# Altium PCB Pedal_Filters_45.PcbDoc (part 4 of 4)
Units mil, origin at the board's own origin, x right, y up, seen from the top; angles counter-clockwise.
Board outline 4875 x 3407.56 mil, 4 copper layers (Top Layer, Layer 1, Layer 2, Bottom Layer); 245 components, 181 nets, 874 pads, 470 vias.
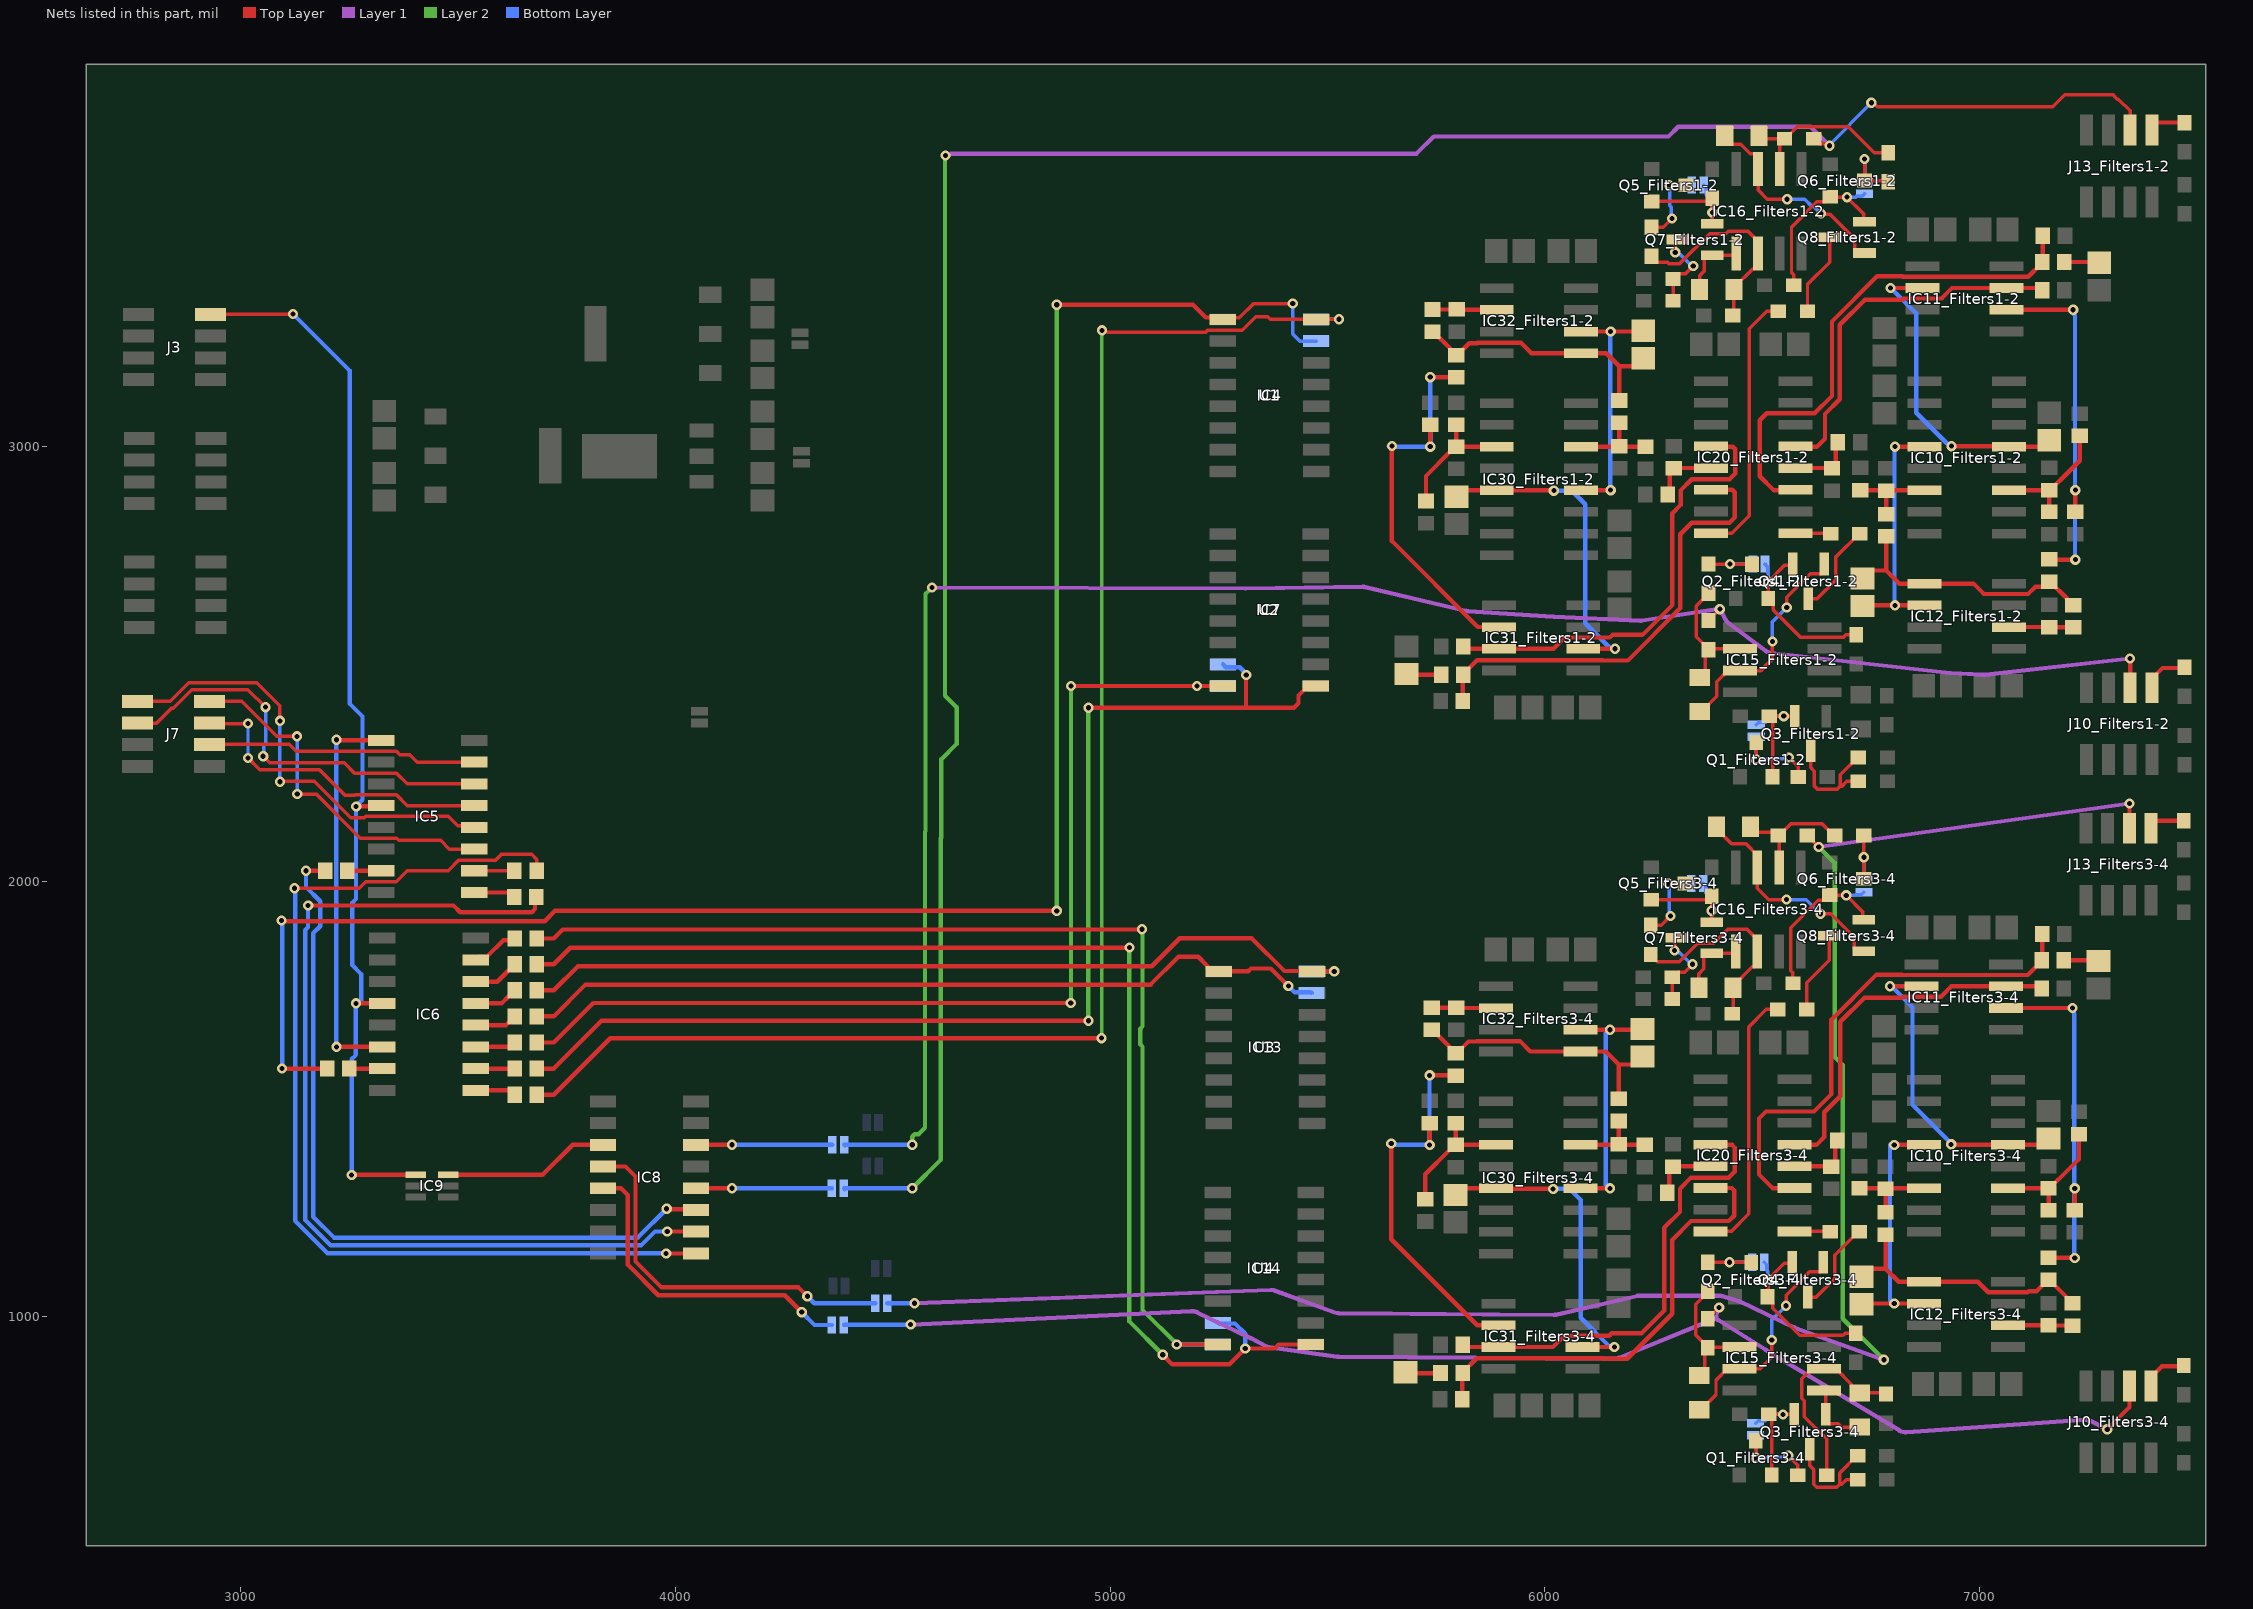
[diagram p5: the nets of this part, all layers, seen from the top]

## Via types
v1: diameter 23.62, hole 11.81, Top Layer to Bottom Layer, 470 vias

## Nets (pads, with @x,y where several pads share a name; then routed paths per layer and width w, separated by ;. In a path a pad name is that pad's centre, name@x,y a point inside that pad or via, vN(x,y) a via of type N, cw(c..) or ccw(c..) an arc to the next point about the centre after c; other vN are vias at no path point) (continued)
NetC1_Filters3-4_1: C1_Filters3-4.1 IC15_Filters3-4.1 Q3_Filters3-4.1 | length 156.6
  Top Layer w8: IC15_Filters3-4.1@6642,829.41 6646,825.41 6646,768.1 6651,763.1 6651,754.41 6653,752.41 6675.5,752.41 6682.87,745.04 C1_Filters3-4.1@6725,745.04
NetC1_Filters3-4_2: C1_Filters3-4.2 IC15_Filters3-4.2 R42_Filters3-4.1 R47_Filters3-4.2 | length 476.1
  Top Layer w8: R42_Filters3-4.1@6648.46,634.41 6648.46,717.97 6597,769.44 6597,805.38 6591,811.38 6591,856.41 6614,879.41 6670,879.41 6705.38,844.03 6705.38,839.46 6721.06,823.78 6782.56,823.78 R47_Filters3-4.2@6785,821.34
NetC2_Filters1-2_1: C2_Filters1-2.1 IC15_Filters1-2.7 Q4_Filters1-2.1 | length 515.2
  Top Layer w8: C2_Filters1-2.1@6360.43,2391.39 6395.31,2426.26 6395.31,2459.57 6421.5,2485.76 6497.3,2485.76 6523.75,2512.21 v1(6523.75,2552.72) ; v1(6556.5,2630.76) 6556.5,2654.73 6610.53,2708.76 6635.5,2708.76 6642.5,2715.76 Q4_Filters1-2.1@6642.5,2730.76
  Bottom Layer w8: v1(6523.75,2552.72) 6523.75,2598.01 v1(6556.5,2630.76)
NetC2_Filters1-2_2: C2_Filters1-2.2 IC15_Filters1-2.6 R44_Filters1-2.1 R48_Filters1-2.2 | length 294
  Top Layer w8: C2_Filters1-2.2@6366.5,2470.76 6369.16,2473.42 6369.16,2526.49 R48_Filters1-2.2@6376.5,2533.83 ; R44_Filters1-2.1@6376.5,2663.83 6376.5,2661.86 6348.75,2634.11 6348.75,2563.54 6376.5,2535.8 R48_Filters1-2.2@6376.5,2533.83 ; IC15_Filters1-2.6@6449.5,2535.76 6378.42,2535.76 R48_Filters1-2.2@6376.5,2533.83
NetC2_Filters3-4_1: C2_Filters3-4.1 IC15_Filters3-4.7 Q4_Filters3-4.1 | length 519.2
  Top Layer w8: C2_Filters3-4.1@6355,785.04 6358.94,785.04 6393.81,819.91 6393.81,853.22 6420,879.41 6495.8,879.41 6522.12,905.72 v1(6522.12,945.76) ; v1(6555,1024.41) 6555,1048.38 6609.03,1102.41 6634,1102.41 6641,1109.41 Q4_Filters3-4.1@6641,1124.41
  Bottom Layer w8: v1(6522.12,945.76) 6522.26,945.9 6522.26,991.67 v1(6555,1024.41)
NetC2_Filters3-4_2: C2_Filters3-4.2 IC15_Filters3-4.6 R44_Filters3-4.1 R48_Filters3-4.2 | length 294
  Top Layer w8: C2_Filters3-4.2@6365,864.41 6367.66,867.07 6367.66,920.14 R48_Filters3-4.2@6375,927.48 ; R44_Filters3-4.1@6375,1057.48 6375,1055.51 6347.25,1027.76 6347.25,957.2 6375,929.45 R48_Filters3-4.2@6375,927.48 ; IC15_Filters3-4.6@6448,929.41 6376.93,929.41 R48_Filters3-4.2@6375,927.48
NetC5_Filters1-2_1: C5_Filters1-2.1 IC12_Filters1-2.1 R2_Filters1-2.1 R8_Filters1-2.2 R11_Filters1-2.2 | length 629.5
  Top Layer w10: C5_Filters1-2.1@6730.5,2697.25 6749,2715.76 6785.5,2715.76 ; R8_Filters1-2.2@6785.5,2794.58 6785.5,2715.76 ; R2_Filters1-2.1@7215.5,2636.35 7213.53,2636.35 7201.8,2648.08 7201.8,2650.84 7162.46,2690.17 7158.53,2690.17 7146.8,2678.43 7128.56,2678.43 7111.88,2661.76 7010.18,2661.76 6986.18,2685.76 IC12_Filters1-2.1@6873.5,2685.76 6815.5,2685.76 6785.5,2715.76
NetC5_Filters1-2_2: C5_Filters1-2.2 IC10_Filters1-2.12 IC12_Filters1-2.2 | length 576.6
  Top Layer w10: C5_Filters1-2.2@6730.5,2634.26 6731.99,2635.76 IC12_Filters1-2.2@6873.5,2635.76 ; v1(6805.5,3000.76) IC10_Filters1-2.12@6873.5,3000.76
  Bottom Layer w10: v1@6804.39,2635.76 v1@6804.39,3000.76
  other v1: 6805.5,2635.76
NetC5_Filters3-4_1: C5_Filters3-4.1 IC12_Filters3-4.1 R2_Filters3-4.1 R8_Filters3-4.2 R11_Filters3-4.2 | length 629.5
  Top Layer w10: C5_Filters3-4.1@6729,1090.91 6747.5,1109.41 6784,1109.41 ; R8_Filters3-4.2@6784,1188.23 6784,1109.41 ; R2_Filters3-4.1@7214,1030 7212.03,1030 7200.3,1041.73 7200.3,1044.49 7160.97,1083.82 7157.03,1083.82 7131.16,1057.94 7113.03,1057.94 7110.49,1055.41 7020.25,1055.41 6996.25,1079.41 IC12_Filters3-4.1@6872,1079.41 6814,1079.41 6784,1109.41
NetC5_Filters3-4_2: C5_Filters3-4.2 IC10_Filters3-4.12 IC12_Filters3-4.2 | length 576.6
  Top Layer w10: C5_Filters3-4.2@6729,1027.91 6730.5,1029.41 IC12_Filters3-4.2@6872,1029.41 ; v1(6804,1394.41) IC10_Filters3-4.12@6872,1394.41
  Bottom Layer w10: v1@6794,1029.41 v1@6794,1394.41
  other v1: 6804,1029.41
NetC6_Filters1-2_2: C6_Filters1-2.2 IC10_Filters1-2.5 IC11_Filters1-2.6 | length 728.8
  Top Layer w10: v1(6795.5,3365.76) IC11_Filters1-2.6@6868.5,3365.76 ; v1(6935.69,3001.98) 6936.3,3001.37 7066.88,3001.37 IC10_Filters1-2.5@7067.5,3000.76 7145.5,3000.76 C6_Filters1-2.2@7160.5,3015.76
  Bottom Layer w10: v1@6795.93,3365.76 6854.27,3307.41 6854.27,3078.91 6924.77,3008.41 6926.15,3008.41 6932.58,3001.98 v1(6935.69,3001.98)
NetC6_Filters3-4_2: C6_Filters3-4.2 IC10_Filters3-4.5 IC11_Filters3-4.6 | length 723.8
  Top Layer w10: v1(6794,1759.41) IC11_Filters3-4.6@6867,1759.41 ; v1(6934.77,1395.64) 6935.38,1395.02 7065.39,1395.02 IC10_Filters3-4.5@7066,1394.41 7144,1394.41 C6_Filters3-4.2@7159,1409.41
  Bottom Layer w10: v1(6794,1759.41) 6797.69,1759.41 6804.5,1752.6 6845.91,1711.19 6845.91,1486.7 v1@6933.21,1399.4
NetC9_Filters1-2_1: C9_Filters1-2.1 R13_Filters1-2.2 | length 80.8
  Top Layer w10: R13_Filters1-2.2@7195.5,3425.76 7273.49,3425.76 C9_Filters1-2.1@7275.5,3423.75
NetC9_Filters3-4_1: C9_Filters3-4.1 R13_Filters3-4.2 | length 80.8
  Top Layer w10: R13_Filters3-4.2@7194,1819.41 7271.99,1819.41 C9_Filters3-4.1@7274,1817.4
NetC10_Filters1-2_1: C10_Filters1-2.1 R18_Filters1-2.2 | length 80.8
  Top Layer w10: C10_Filters1-2.1@5681.5,2477.76 5683.5,2475.76 R18_Filters1-2.2@5761.5,2475.76
NetC10_Filters3-4_1: C10_Filters3-4.1 R18_Filters3-4.2 | length 80.8
  Top Layer w10: C10_Filters3-4.1@5680,871.42 5682.01,869.41 R18_Filters3-4.2@5760,869.41
NetC11_Filters1-2_2: C11_Filters1-2.2 IC30_Filters1-2.5 IC31_Filters1-2.6 | length 745.9
  Top Layer w10: C11_Filters1-2.2@5796.5,2885.76 5811.5,2900.76 IC30_Filters1-2.5@5889.5,2900.76 5890.11,2900.14 6020.12,2900.14 v1(6020.73,2899.53) ; IC31_Filters1-2.6@6088.5,2535.76 v1(6161.5,2535.76)
  Bottom Layer w10: v1(6020.73,2899.53) 6061.74,2899.53 6092.77,2868.5 6092.77,2594.48 v1@6151.5,2535.76
NetC11_Filters3-4_2: C11_Filters3-4.2 IC30_Filters3-4.5 IC31_Filters3-4.6 | length 744.1
  Top Layer w10: C11_Filters3-4.2@5795,1279.41 5810,1294.41 IC30_Filters3-4.5@5888,1294.41 5888.61,1293.8 6018.62,1293.8 v1(6019.23,1293.18) ; IC31_Filters3-4.6@6087,929.41 v1(6160,929.41)
  Bottom Layer w10: v1(6019.23,1293.18) 6057.17,1293.18 6082.75,1267.6 6082.75,996.66 v1@6150,929.41
NetC12_Filters1-2_1: C12_Filters1-2.1 IC32_Filters1-2.1 R20_Filters1-2.2 R25_Filters1-2.2 R31_Filters1-2.1 | length 629.4
  Top Layer w10: R31_Filters1-2.1@5741.5,3265.17 5743.46,3265.17 5782.8,3225.84 5782.8,3223.08 5794.53,3211.35 5798.46,3211.35 5825.92,3238.8 5844.35,3238.8 5845.16,3239.61 5945.19,3239.61 5969.05,3215.76 6083.5,3215.76 6141.5,3215.76 6171.5,3185.76 ; R25_Filters1-2.2@6171.5,3106.94 6171.5,3185.76 ; C12_Filters1-2.1@6226.5,3204.26 6207.99,3185.76 6171.5,3185.76
NetC12_Filters1-2_2: C12_Filters1-2.2 IC30_Filters1-2.12 IC32_Filters1-2.2 | length 576.7
  Top Layer w10: IC30_Filters1-2.12@6083.5,2900.76 v1(6151.5,2900.76) ; IC32_Filters1-2.2@6083.5,3265.76 6083.57,3265.69 6151.42,3265.69 v1(6151.5,3265.76) 6225,3265.76 C12_Filters1-2.2@6226.5,3267.25
  Bottom Layer w10: v1@6150.29,2901.68 v1@6150.29,3266.68
NetC12_Filters3-4_1: C12_Filters3-4.1 IC32_Filters3-4.1 R20_Filters3-4.2 R25_Filters3-4.2 R31_Filters3-4.1 | length 629.4
  Top Layer w10: R31_Filters3-4.1@5740,1658.82 5741.97,1658.82 5781.3,1619.49 5781.3,1616.73 5793.03,1605 5796.97,1605 5824.42,1632.46 5842.85,1632.46 5843.66,1633.27 5942.74,1633.27 5966.6,1609.41 6082,1609.41 6140,1609.41 6170,1579.41 ; R25_Filters3-4.2@6170,1500.59 6170,1579.41 ; C12_Filters3-4.1@6225,1597.91 6206.5,1579.41 6170,1579.41
NetC12_Filters3-4_2: C12_Filters3-4.2 IC30_Filters3-4.12 IC32_Filters3-4.2 | length 576.6
  Top Layer w10: IC30_Filters3-4.12@6082,1294.41 v1(6150,1294.41) ; IC32_Filters3-4.2@6082.07,1659.34 6149.93,1659.34 v1(6150,1659.41) 6223.5,1659.41 C12_Filters3-4.2@6225,1660.91
  Bottom Layer w10: v1@6140,1294.41 v1@6140,1659.41
NetC27_Filters1-2_1: C27_Filters1-2.1 IC16_Filters1-2.1 Q7_Filters1-2.1 | length 154.4
  Top Layer w8: C27_Filters1-2.1@6356.13,3362.35 6356.13,3394.48 6367.31,3405.66 6367.31,3434.35 6374.31,3441.35 6436.5,3441.35 IC16_Filters1-2.1@6440.5,3445.35
NetC27_Filters1-2_2: C27_Filters1-2.2 IC16_Filters1-2.2 R52_Filters1-2.1 R58_Filters1-2.2 | length 489.2
  Top Layer w8: R52_Filters1-2.1@6245.5,3436.91 6257.24,3425.17 6282.4,3425.17 6285.53,3422.04 6310.69,3422.04 6378.99,3490.35 6416.47,3490.35 6422.47,3496.35 6467.5,3496.35 6490.5,3473.35 6490.5,3417.35 6483.5,3410.35 6478.93,3410.35 6434.87,3366.28 6434.87,3304.79 R58_Filters1-2.2@6432.43,3302.35
NetC27_Filters3-4_1: C27_Filters3-4.1 IC16_Filters3-4.1 Q7_Filters3-4.1 | length 154.4
  Top Layer w8: C27_Filters3-4.1@6354.63,1756 6354.63,1788.13 6365.81,1799.31 6365.81,1828 6372.81,1835 6435,1835 IC16_Filters3-4.1@6439,1839
NetC27_Filters3-4_2: C27_Filters3-4.2 IC16_Filters3-4.2 R52_Filters3-4.1 R58_Filters3-4.2 | length 491.2
  Top Layer w8: R52_Filters3-4.1@6244,1832.54 6244,1830.57 6258.88,1815.69 6309.19,1815.69 6351.5,1858 6388.97,1858 6420.97,1890 6466,1890 6489,1867 6489,1811 6482,1804 6477.43,1804 6433.37,1759.94 6433.37,1698.44 R58_Filters3-4.2@6430.93,1696
NetC28_Filters1-2_1: C28_Filters1-2.1 IC16_Filters1-2.7 Q8_Filters1-2.1 | length 490.6
  Top Layer w8: C28_Filters1-2.1@6413.96,3712.1 6429.65,3696.42 6450.4,3696.42 6472.47,3674.35 6483.5,3674.35 6490.5,3667.35 IC16_Filters1-2.7@6490.5,3639.35 6490.5,3591.55 6512.05,3570 v1(6557.46,3570) ; v1(6635.5,3537) 6636.78,3535.71 6656.11,3535.71 6713.5,3478.32 6713.5,3453.35 6720.5,3446.35 Q8_Filters1-2.1@6735.5,3446.35
  Bottom Layer w8: v1(6557.46,3570) 6597.85,3570 6613.51,3554.34 6618.15,3554.34 v1(6635.5,3537)
NetC28_Filters1-2_2: C28_Filters1-2.2 IC16_Filters1-2.6 R54_Filters1-2.1 R59_Filters1-2.2 | length 413.9
  Top Layer w8: C28_Filters1-2.2@6495.8,3708.92 R59_Filters1-2.2@6551.34,3708.92 6540.5,3698.08 IC16_Filters1-2.6@6540.5,3639.35 ; R59_Filters1-2.2@6540.54,3712.35 6556.73,3712.35 6581.05,3736.67 6697.99,3736.67 6757.73,3676.93 R54_Filters1-2.1@6790,3676.93
NetC28_Filters3-4_1: C28_Filters3-4.1 IC16_Filters3-4.7 Q8_Filters3-4.1 | length 519.2
  Top Layer w8: C28_Filters3-4.1@6394.63,2126 6394.63,2122.06 6429.5,2087.19 6462.81,2087.19 6489,2061 6489,1985.2 6515.46,1958.74 v1(6555.97,1958.74) ; v1(6634.31,1925.99) 6657.98,1925.99 6712,1871.97 6712,1847 6719,1840 Q8_Filters3-4.1@6734,1840
  Bottom Layer w8: v1(6555.97,1958.74) 6601.26,1958.74 6634.01,1925.99 v1(6634.31,1925.99)
NetC28_Filters3-4_2: C28_Filters3-4.2 IC16_Filters3-4.6 R54_Filters3-4.1 R59_Filters3-4.2 | length 294
  Top Layer w8: C28_Filters3-4.2@6474,2116 6476.66,2113.34 6531.7,2113.34 6539.04,2106 6566.79,2133.75 6637.35,2133.75 6665.1,2106 R54_Filters3-4.1@6667.07,2106 ; R59_Filters3-4.2@6537.07,2106 6539,2104.07 IC16_Filters3-4.6@6539,2033
NetIC4_1: IC4.1 R21.1 U1.10 | length 4335.9
  Top Layer w8: IC4.1@5259.57,3293.74 5263.23,3297.4 5297.4,3297.4 5330,3330 v1(5420,3330)
  Top Layer w10: v1(3093.53,1910.92) 3095.36,1909.1 3699.1,1909.1 3722.84,1932.84 v1(4877.16,1932.84) ; v1(3095,1570) R21.1@3198.82,1570 ; v1(4877.16,3327.16) 5190.8,3327.16 5219.92,3298.03 5255.27,3298.03 IC4.1@5259.57,3293.74
  Layer 2 w10: v1(4877.16,1932.84) v1(4877.16,3327.16)
  Bottom Layer w8: v1(5420,3330) 5420,3260 5436.26,3243.74 U1.10@5473.63,3243.74
  Bottom Layer w10: v1(3093.53,1910.92) 3095,1909.46 v1(3095,1570)
NetIC4_16: IC4.16 R22.1 U1.9 | length 3597.5
  Top Layer w8: v1(4981.16,3268.27) 4984.15,3265.28 4992.79,3265.28 4993.66,3264.41 5219.96,3264.41 5224.09,3268.53 5304.12,3268.53 5334.86,3299.27 5362.46,3299.27 5368,3293.74 v1(5526.26,3293.74)
  Top Layer w10: R22.1@3681.18,1510 3720,1510 3850,1640 v1(4980,1640)
  Layer 2 w8: v1(4980,1640) 4981.16,1641.16 v1(4981.16,3268.27)
  Bottom Layer w8: U1.9@5473.63,3293.74 v1(5526.26,3293.74)
NetIC5_1: IC5.1 R34.1 | length 95.7
  Top Layer w10: IC5.1@3537.28,1975 3618.82,1975 R34.1@3628.82,1965
NetIC5_2: IC5.2 R35.1 | length 92.1
  Top Layer w8: IC5.2@3537.28,2025 R35.1@3629.41,2025
NetIC5_9: IC5.9 IC6.14 | length 915.2
  Top Layer w10: v1(3220,1620) IC6.14@3325.43,1620 ; v1(3220,2326.46) 3220.76,2325.7 3322.02,2325.7 IC5.9@3322.72,2325
  Bottom Layer w10: v1(3220,1620) v1(3220,2326.46)
NetIC5_15: IC5.15 R33.1 | length 77.7
  Top Layer w10: R33.1@3245,2025 IC5.15@3322.72,2025
NetIC6_1: IC6.1 R22.2 | length 94.1
  Top Layer w10: IC6.1@3540,1520 3620,1520 R22.2@3630,1510
NetIC6_2: IC6.2 R36.2 | length 90
  Top Layer w10: IC6.2@3540,1570 R36.2@3630,1570
NetIC6_3: IC6.3 R37.2 | length 94.1
  Top Layer w10: IC6.3@3540,1620 3620,1620 R37.2@3630,1630
NetIC6_4: IC6.4 R38.2 | length 99.4
  Top Layer w10: IC6.4@3540,1670 3610,1670 3616.3,1676.3 3618.27,1676.3 3630,1688.03 R38.2@3630,1690
NetIC6_5: IC6.5 R39.2 | length 103.6
  Top Layer w10: IC6.5@3540,1720 3600,1720 3616.3,1736.3 3618.27,1736.3 3630,1748.03 R39.2@3630,1750
NetIC6_6: IC6.6 R40.2 | length 107.7
  Top Layer w10: IC6.6@3540,1770 3590,1770 3616.3,1796.3 3618.27,1796.3 3630,1808.03 R40.2@3630,1810
NetIC6_7: IC6.7 R41.2 | length 110.5
  Top Layer w10: IC6.7@3540,1820 3547.8,1827.8 3566.61,1827.8 3604.13,1865.31 3625.9,1865.31 R41.2@3630,1869.41
NetIC6_15: IC6.15 R21.2 | length 75.4
  Top Layer w10: R21.2@3250,1570 IC6.15@3325.43,1570
NetIC7_1: IC7.1 R36.1 U2.10 | length 2729.1
  Top Layer w10: R36.1@3681.18,1570 3720,1570 3830,1680 v1(4950,1680) ; v1(4950,2400) 5312.73,2400 ; v1@5312.73,2475.07 5312.73,2400 ; IC7.1@5473.15,2450.08 5455.43,2450.08 5433.49,2428.14 5433.49,2410.43 5423.07,2400 5312.73,2400
  Layer 2 w10: v1(4950,1680) v1(4950,2400)
  Bottom Layer w10: U2.10@5259.6,2500.08 5266.18,2493.5 5298.05,2493.5 5313.26,2478.29 v1(5313.26,2475.61)
NetIC7_16: IC7.16 R37.1 U2.9 | length 2403.4
  Top Layer w10: R37.1@3681.18,1630 3720,1630 3810.71,1720.71 v1(4909.29,1720.71) ; v1(4910.08,2450.08) IC7.16@5258.58,2450.08
  Layer 2 w10: v1(4909.29,1720.71) 4910.08,1721.5 v1(4910.08,2450.08)
  Bottom Layer w10: v1(5200.08,2450.08) U2.9@5259.6,2450.08
NetIC8_3: IC8.3 IC9.6 | length 385.6
  Top Layer w10: IC9.6@3477.4,1325.59 3694.41,1325.59 3763.52,1394.71 IC8.3@3833.58,1394.71 IC8.3@3832.99,1395.3
NetIC8_9: IC8.9 R35.2 | length 2339.4
  Top Layer w8: v1(3123.37,1984.81) 3123.56,1985 3272.44,1985 3287.23,1999.8 3357.79,1999.8 3382.99,2025 3477.01,2025 3501.8,2049.8 3586.53,2049.8 3599.68,2062.95 3669.04,2062.95 3680.98,2051.01 3680.98,2025.39 R35.2@3680.59,2025
  Top Layer w10: v1(3978.58,1144.71) IC8.9@4047.13,1144.71
  Bottom Layer w10: v1(3123.37,1984.81) 3125,1983.18 3125,1219.72 3199.53,1145.19 v1@3978.1,1145.19
NetIC8_10: IC8.10 R34.2 | length 2221.8
  Top Layer w10: v1(3155,1945) 3489.49,1945 3504.96,1929.53 3669.36,1929.53 3676.99,1937.16 3676.99,1961.99 R34.2@3679.31,1964.31 ; v1(3981.07,1195.32) 4046.51,1195.32 IC8.10@4047.13,1194.71
  Bottom Layer w10: v1@3154.72,1944.72 3154.72,1894.91 3148.38,1888.56 3148.38,1221.79 3206.98,1163.19 3920.73,1163.19 3952.86,1195.32 v1(3981.07,1195.32)
NetIC8_11: IC8.11 R33.2 | length 1789.3
  Top Layer w10: v1(3150,2025) R33.2@3193.82,2025 ; v1(3979.7,1247.62) 3981.16,1246.16 4045.67,1246.16 IC8.11@4047.13,1244.71
  Bottom Layer w10: v1(3150,2025) 3150,1987.92 3182.73,1955.19 3182.73,1897.46 3166.38,1881.11 3166.38,1229.25 3214.44,1181.19 3913.28,1181.19 v1(3979.7,1247.62)
NetIC10_Filters1-2_3: IC10_Filters1-2.3 R3_Filters1-2.2 R7_Filters1-2.2 R9_Filters1-2.1 | length 298.5
  Top Layer w10: IC10_Filters1-2.3@7067.5,2900.76 R3_Filters1-2.2@7160.5,2900.76 ; R7_Filters1-2.2@7160.5,2850.76 R3_Filters1-2.2@7160.5,2900.76 ; R9_Filters1-2.1@7230.5,3025.76 7230.5,2968.12 7184.58,2922.21 7183.91,2922.21 7162.46,2900.76 R3_Filters1-2.2@7160.5,2900.76
NetIC10_Filters1-2_14: IC10_Filters1-2.14 R1_Filters1-2.2 R4_Filters1-2.2 R8_Filters1-2.1 | length 202.8
  Top Layer w10: R4_Filters1-2.2@6725.5,2900.76 6784.31,2900.76 R1_Filters1-2.2@6785.5,2899.58 ; R8_Filters1-2.1@6785.5,2845.76 R1_Filters1-2.2@6785.5,2899.58 ; IC10_Filters1-2.14@6873.5,2900.76 6786.68,2900.76 R1_Filters1-2.2@6785.5,2899.58
NetIC10_Filters3-4_3: IC10_Filters3-4.3 R3_Filters3-4.2 R7_Filters3-4.2 R9_Filters3-4.1 | length 298.5
  Top Layer w10: IC10_Filters3-4.3@7066,1294.41 R3_Filters3-4.2@7159,1294.41 ; R7_Filters3-4.2@7159,1244.41 R3_Filters3-4.2@7159,1294.41 ; R9_Filters3-4.1@7229,1419.41 7229,1361.77 7183.09,1315.86 7182.42,1315.86 7160.97,1294.41 R3_Filters3-4.2@7159,1294.41
NetIC10_Filters3-4_14: IC10_Filters3-4.14 R1_Filters3-4.2 R4_Filters3-4.2 R8_Filters3-4.1 | length 202.8
  Top Layer w10: R4_Filters3-4.2@6724,1294.41 6782.82,1294.41 R1_Filters3-4.2@6784,1293.23 ; R8_Filters3-4.1@6784,1239.41 R1_Filters3-4.2@6784,1293.23 ; IC10_Filters3-4.14@6872,1294.41 6785.18,1294.41 R1_Filters3-4.2@6784,1293.23
NetIC11_Filters1-2_2: IC11_Filters1-2.2 R10_Filters1-2.1 R11_Filters1-2.1 | length 840.9
  Top Layer w10: IC11_Filters1-2.2@7062.5,3315.76 v1(7215.5,3315.76) ; R11_Filters1-2.1@7160.5,2741.35 7161.09,2740.76 v1(7220.5,2740.76) ; R10_Filters1-2.1@7220.5,2850.76 v1(7220.5,2900.76)
  Bottom Layer w10: v1(7215.5,3315.76) 7218.1,3313.15 7218.1,3304.83 7219.85,3303.09 v1@7219.85,2739.89
NetIC11_Filters1-2_3: IC11_Filters1-2.3 IC20_Filters1-2.5 R6_Filters1-2.2 | length 855.8
  Top Layer w10: IC20_Filters1-2.5@6575.5,3000.76 6626.32,3000.76 6644.58,3019.02 6644.58,3076 6678.54,3109.96 6678.54,3281.17 6736.31,3338.95 6823.3,3338.95 6826.11,3341.76 6912.88,3341.76 6936.88,3365.76 IC11_Filters1-2.3@7062.5,3365.76 7139.31,3365.76 R6_Filters1-2.2@7144.31,3360.76
NetIC11_Filters3-4_2: IC11_Filters3-4.2 R10_Filters3-4.1 R11_Filters3-4.1 | length 843.3
  Top Layer w10: IC11_Filters3-4.2@7061,1709.41 v1(7214,1709.41) ; R11_Filters3-4.1@7159,1135 7159.59,1134.41 v1(7219,1134.41) ; R10_Filters3-4.1@7219,1244.41 v1(7219,1294.41)
  Bottom Layer w10: v1(7214,1709.41) 7216.61,1706.8 7216.61,1698.49 7218.36,1696.74 v1@7218.36,1131.13
NetIC11_Filters3-4_3: IC11_Filters3-4.3 IC20_Filters3-4.5 R6_Filters3-4.2 | length 855.8
  Top Layer w10: IC20_Filters3-4.5@6574,1394.41 6624.83,1394.41 6643.09,1412.67 6643.09,1469.66 6679.82,1506.39 6679.82,1677.6 6734.82,1732.6 6821.8,1732.6 6824.62,1735.41 6911.38,1735.41 6935.38,1759.41 IC11_Filters3-4.3@7061,1759.41 7137.82,1759.41 R6_Filters3-4.2@7142.82,1754.41
NetIC12_Filters1-2_6: IC12_Filters1-2.6 R2_Filters1-2.2 R5_Filters1-2.1 | length 148.2
  Top Layer w10: IC12_Filters1-2.6@7067.64,2585.9 7067.78,2585.76 7159.91,2585.76 7160.5,2585.17 R2_Filters1-2.2@7215.5,2585.17
NetIC12_Filters3-4_6: IC12_Filters3-4.6 R2_Filters3-4.2 R5_Filters3-4.1 | length 148.2
  Top Layer w10: IC12_Filters3-4.6@7066.14,979.55 7066.28,979.41 7158.41,979.41 7159,978.82 R2_Filters3-4.2@7214,978.82
NetIC13_1: IC13.1 R38.1 U3.10 | length 1881.2
  Top Layer w10: R38.1@3681.18,1690 3720,1690 3793.14,1763.14 5093.14,1763.14 5157.09,1827.09 5202.48,1827.09 5224.57,1805 5224.57,1801.53 5232.37,1793.74 5317.55,1793.74 5324.08,1800.27 5369.73,1800.27 v1(5410,1760)
  Bottom Layer w10: v1(5410,1760) 5424.44,1745.56 5461.81,1745.56 U3.10@5463.63,1743.74
NetIC13_16: IC13.16 R39.1 U3.9 | length 1967.6
  Top Layer w10: R39.1@3681.18,1750 3720,1750 3775.56,1805.56 5095.56,1805.56 5160,1870 5325.46,1870 5400.92,1794.53 5463.86,1794.53 IC13.16@5464.65,1793.74 v1(5515.53,1793.74)
  Bottom Layer w10: U3.9@5463.63,1793.74 v1(5515.53,1793.74)
NetIC14_1: IC14.1 R40.1 U4.10 | length 2823.1
  Top Layer w10: R40.1@3681.18,1810 3720,1810 3757.99,1847.99 5043.89,1847.99 v1(5044.31,1848.4) ; v1(5120.89,911.61) 5142.5,890 5274.63,890 v1(5310.7,926.06) 5378.62,926.06 5387.64,935.08 IC14.1@5461.69,935.08
  Layer 2 w10: v1(5044.31,1848.4) 5044.31,988.19 v1(5120.89,911.61)
  Bottom Layer w10: U4.10@5248.15,985.08 5249.71,983.52 5287.33,983.52 5310.89,959.95 5310.89,926.25 v1(5310.7,926.06)
NetIC14_16: IC14.16 R41.1 U4.9 | length 2582.9
  Top Layer w10: R41.1@3681.18,1869.41 3720,1869.41 3740.59,1890 5072.6,1890 v1(5073.24,1890.64) ; v1(5153.21,935.47) 5153.41,935.27 5246.93,935.27 IC14.16@5247.12,935.08
  Layer 2 w10: v1(5073.24,1890.64) 5074.62,1889.25 5074.62,1667 5069.09,1661.47 5069.09,1626.01 5074.62,1620.47 5074.62,1014.76 5153.21,936.17 v1(5153.21,935.47)
  Bottom Layer w10: v1(5153.21,935.47) 5153.6,935.08 U4.9@5248.15,935.08
NetIC20_Filters1-2_3: IC20_Filters1-2.3 R12_Filters1-2.2 R13_Filters1-2.1 | length 1184.1
  Top Layer w10: IC20_Filters1-2.3@6575.5,2900.76 6526.32,2900.76 6494.39,2932.69 6494.39,3061.61 6510.37,3077.58 6620.71,3077.58 6660.54,3117.41 6660.54,3288.63 6764.48,3392.57 6823.3,3392.57 6824.11,3391.76 7112.28,3391.76 R13_Filters1-2.1@7143.93,3423.4 ; R13_Filters1-2.1@7144.31,3425.76 7145.5,3426.94 R12_Filters1-2.2@7145.5,3485.76
NetIC20_Filters1-2_4: IC20_Filters1-2.4 R14_Filters1-2.2 R15_Filters1-2.1 | length 151.4
  Top Layer w10: IC20_Filters1-2.4@6575.5,2950.76 IC20_Filters1-2.4@6576.32,2951.58 6659.67,2951.58 R14_Filters1-2.2@6660.5,2950.76 6669.51,2959.77 6669.51,3005.96 R15_Filters1-2.1@6674.31,3010.76
NetIC20_Filters1-2_12: IC20_Filters1-2.12 IC31_Filters1-2.3 R27_Filters1-2.2 | length 1052.7
  Top Layer w10: R27_Filters1-2.2@5812.68,2540.76 5817.68,2535.76 IC31_Filters1-2.3@5894.5,2535.76 6020.11,2535.76 6046.11,2561.76 6149.58,2561.76 6155.58,2567.76 6224.51,2567.76 6293.5,2636.74 6293.5,2847.76 6312.41,2866.67 6312.41,2900.06 6337.94,2925.58 6424.71,2925.58 6438.18,2939.06 6438.18,2994.9 6432.32,3000.76 IC20_Filters1-2.12@6381.5,3000.76
NetIC20_Filters1-2_13: IC20_Filters1-2.13 R16_Filters1-2.1 R17_Filters1-2.2 | length 151.4
  Top Layer w10: R16_Filters1-2.1@6282.68,2890.76 6287.48,2895.56 6287.48,2941.74 6297.32,2951.58 6380.67,2951.58 IC20_Filters1-2.13@6381.5,2950.76
NetIC20_Filters1-2_14: IC20_Filters1-2.14 R18_Filters1-2.1 R19_Filters1-2.2 | length 1048.7
  Top Layer w10: R19_Filters1-2.2@5811.5,2415.76 5811.5,2474.58 R18_Filters1-2.1@5812.68,2475.76 ; R18_Filters1-2.1@5813.06,2478.11 5844.71,2509.76 6132.88,2509.76 6133.69,2508.95 6191.16,2508.95 6311.5,2629.28 6311.5,2799.14 6337.94,2825.58 6424.71,2825.58 6437.12,2838 6437.12,2895.72 6431.26,2901.58 IC20_Filters1-2.14@6382.32,2901.58
NetIC20_Filters3-4_3: IC20_Filters3-4.3 R12_Filters3-4.2 R13_Filters3-4.1 | length 1184.1
  Top Layer w10: IC20_Filters3-4.3@6574,1294.41 6524.83,1294.41 6492.89,1326.34 6492.89,1455.26 6508.87,1471.23 6619.21,1471.23 6659.23,1511.25 6659.23,1682.46 6762.98,1786.22 6821.8,1786.22 6822.62,1785.41 7110.79,1785.41 R13_Filters3-4.1@7142.44,1817.06 ; R13_Filters3-4.1@7142.82,1819.41 7144,1820.59 R12_Filters3-4.2@7144,1879.41
NetIC20_Filters3-4_4: IC20_Filters3-4.4 R14_Filters3-4.2 R15_Filters3-4.1 | length 151.4
  Top Layer w10: IC20_Filters3-4.4@6574,1344.41 IC20_Filters3-4.4@6574.83,1345.23 6658.17,1345.23 R14_Filters3-4.2@6659,1344.41 6668.02,1353.43 6668.02,1399.61 R15_Filters3-4.1@6672.82,1404.41
NetIC20_Filters3-4_12: IC20_Filters3-4.12 IC31_Filters3-4.3 R27_Filters3-4.2 | length 1052.7
  Top Layer w10: R27_Filters3-4.2@5811.18,934.41 5816.18,929.41 IC31_Filters3-4.3@5893,929.41 6018.62,929.41 6044.62,955.41 6148.08,955.41 6154.08,961.41 6223.02,961.41 6275,1013.39 6275,1204.15 6310.91,1240.06 6310.91,1293.71 6336.44,1319.23 6423.21,1319.23 6436.68,1332.71 6436.68,1388.55 6430.83,1394.41 IC20_Filters3-4.12@6380,1394.41
NetIC20_Filters3-4_13: IC20_Filters3-4.13 R16_Filters3-4.1 R17_Filters3-4.2 | length 151.4
  Top Layer w10: R16_Filters3-4.1@6281.18,1284.41 6285.98,1289.21 6285.98,1335.39 6295.83,1345.23 6379.17,1345.23 IC20_Filters3-4.13@6380,1344.41
NetIC20_Filters3-4_14: IC20_Filters3-4.14 R18_Filters3-4.1 R19_Filters3-4.2 | length 1048.7
  Top Layer w10: R19_Filters3-4.2@5810,809.41 5810,868.23 R18_Filters3-4.1@5811.18,869.41 ; R18_Filters3-4.1@5811.56,871.76 5843.21,903.41 6131.38,903.41 6132.2,902.6 6189.66,902.6 6293,1005.94 6293,1175.79 6336.44,1219.23 6423.21,1219.23 6435.62,1231.65 6435.62,1289.38 6429.77,1295.23 IC20_Filters3-4.14@6380.83,1295.23
NetIC30_Filters1-2_3: IC30_Filters1-2.3 R24_Filters1-2.1 R26_Filters1-2.2 R30_Filters1-2.2 | length 298.5
  Top Layer w10: R24_Filters1-2.1@5726.5,2875.76 5726.5,2933.39 5782.13,2989.02 5784.76,2989.02 R30_Filters1-2.2@5796.5,3000.76 ; R26_Filters1-2.2@5796.5,3050.76 R30_Filters1-2.2@5796.5,3000.76 ; IC30_Filters1-2.3@5889.5,3000.76 R30_Filters1-2.2@5796.5,3000.76
NetIC30_Filters1-2_14: IC30_Filters1-2.14 R25_Filters1-2.1 R29_Filters1-2.2 R32_Filters1-2.2 | length 202.8
  Top Layer w10: IC30_Filters1-2.14@6083.5,3000.76 6170.31,3000.76 R32_Filters1-2.2@6171.5,3001.94 ; R25_Filters1-2.1@6171.5,3055.76 R32_Filters1-2.2@6171.5,3001.94 ; R29_Filters1-2.2@6231.5,3000.76 6172.68,3000.76 R32_Filters1-2.2@6171.5,3001.94
NetIC30_Filters3-4_3: IC30_Filters3-4.3 R24_Filters3-4.1 R26_Filters3-4.2 R30_Filters3-4.2 | length 298.5
  Top Layer w10: R24_Filters3-4.1@5725,1269.41 5725,1327.05 5780.63,1382.68 5783.27,1382.68 R30_Filters3-4.2@5795,1394.41 ; R26_Filters3-4.2@5795,1444.41 R30_Filters3-4.2@5795,1394.41 ; IC30_Filters3-4.3@5888,1394.41 R30_Filters3-4.2@5795,1394.41
NetIC30_Filters3-4_14: IC30_Filters3-4.14 R25_Filters3-4.1 R29_Filters3-4.2 R32_Filters3-4.2 | length 202.8
  Top Layer w10: IC30_Filters3-4.14@6082,1394.41 6168.82,1394.41 R32_Filters3-4.2@6170,1395.59 ; R25_Filters3-4.1@6170,1449.41 R32_Filters3-4.2@6170,1395.59 ; R29_Filters3-4.2@6230,1394.41 6171.18,1394.41 R32_Filters3-4.2@6170,1395.59
NetIC31_Filters1-2_2: IC31_Filters1-2.2 R20_Filters1-2.1 R23_Filters1-2.1 | length 912.6
  Top Layer w10: v1(5648.19,3002.5) 5648.19,2783.52 5845.96,2585.76 IC31_Filters1-2.2@5894.5,2585.76 ; v1(5736.5,3000.76) R23_Filters1-2.1@5736.5,3050.76 ; v1(5736.5,3160.76) 5795.91,3160.76 R20_Filters1-2.1@5796.5,3160.17
  Bottom Layer w10: v1@5640.8,3001.49 5647.18,3001.49 v1(5648.19,3002.5) ; v1@5650.13,3001.49 5650.86,3000.76 v1(5736.5,3000.76) v1@5736.51,3161.37
NetIC31_Filters3-4_2: IC31_Filters3-4.2 R20_Filters3-4.1 R23_Filters3-4.1 | length 914
  Top Layer w10: v1(5646.7,1397.75) 5646.7,1177.18 5844.47,979.41 IC31_Filters3-4.2@5893,979.41 ; v1(5735,1394.41) R23_Filters3-4.1@5735,1444.41 ; v1(5735,1554.41) 5794.41,1554.41 R20_Filters3-4.1@5795,1553.82
  Bottom Layer w10: v1@5639.31,1395.14 5648.63,1395.14 5649.37,1394.41 5734.88,1394.41 v1@5734.88,1553.52
NetIC32_Filters1-2_6: IC32_Filters1-2.6 R28_Filters1-2.1 R31_Filters1-2.2 | length 148.2
  Top Layer w10: R31_Filters1-2.2@5741.5,3316.35 5797.53,3316.35 5798.27,3315.61 IC32_Filters1-2.6@5889.35,3315.61
NetIC32_Filters3-4_6: IC32_Filters3-4.6 R28_Filters3-4.1 R31_Filters3-4.2 | length 148.2
  Top Layer w10: R31_Filters3-4.2@5740,1710 5796.04,1710 5796.77,1709.27 IC32_Filters3-4.6@5887.86,1709.27
NetJ8_Filters1-2_1: J8_Filters1-2.1 Q1_Filters1-2.3 R42_Filters1-2.2 | length 222.8
  Top Layer w8: v1(6486.5,2280.76) Q1_Filters1-2.3@6486.5,2320.13 ; v1(6561.5,2285.76) 6583.03,2264.22 R42_Filters1-2.2@6583.03,2240.76
  Bottom Layer w8: J8_Filters1-2.1@6486.5,2333.2 6486.5,2283.75 v1(6486.5,2280.76) 6488.47,2282.73 6554.25,2282.73 6557.27,2285.76 v1(6561.5,2285.76)
NetJ8_Filters1-2_2: J8_Filters1-2.2 Q1_Filters1-2.2 Q3_Filters1-2.2 R43_Filters1-2.1 | length 272.8
  Top Layer w8: Q1_Filters1-2.2@6523.9,2241.39 6523.9,2373.36 R43_Filters1-2.1@6516.5,2380.76 Q3_Filters1-2.2@6575.5,2380.76
  Bottom Layer w8: J8_Filters1-2.2@6486.5,2360.76 6492.34,2366.6 6508.34,2366.6 6522.5,2380.76 v1(6549.55,2380.76)
NetJ8_Filters3-4_1: J8_Filters3-4.1 Q1_Filters3-4.3 R42_Filters3-4.2 | length 222.8
  Top Layer w8: v1(6485,674.41) Q1_Filters3-4.3@6485,713.78 ; v1(6560,679.41) 6581.54,657.87 R42_Filters3-4.2@6581.54,634.41
  Bottom Layer w8: J8_Filters3-4.1@6485,726.85 6485,677.4 v1(6485,674.41) 6486.98,676.39 6552.75,676.39 6555.77,679.41 v1(6560,679.41)
NetJ8_Filters3-4_2: J8_Filters3-4.2 Q1_Filters3-4.2 Q3_Filters3-4.2 R43_Filters3-4.1 | length 272.8
  Top Layer w8: Q1_Filters3-4.2@6522.4,635.04 6522.4,767.01 R43_Filters3-4.1@6515,774.41 Q3_Filters3-4.2@6574,774.41
  Bottom Layer w8: J8_Filters3-4.2@6485,754.41 6490.84,760.25 6506.84,760.25 6521,774.41 v1(6548.06,774.41)
NetJ9_Filters1-2_1: J9_Filters1-2.1 Q2_Filters1-2.3 R44_Filters1-2.2 | length 153
  Top Layer w8: R44_Filters1-2.2@6376.5,2730.76 6475.87,2730.76 Q2_Filters1-2.3@6476.5,2730.13
  Bottom Layer w8: v1(6426.18,2730.76) J9_Filters1-2.1@6478.94,2730.76
NetJ9_Filters1-2_2: J9_Filters1-2.2 Q2_Filters1-2.2 Q4_Filters1-2.2 R45_Filters1-2.1 | length 405.7
  Top Layer w8: Q4_Filters1-2.2@6570.5,2730.76 6568.19,2728.45 6552.18,2728.45 v1(6514,2690.27) 6514,2651.49 Q2_Filters1-2.2@6513.9,2651.39 6525.65,2639.64 6525.65,2625.11 6587.99,2562.76 6687.47,2562.76 6692.4,2567.69 R45_Filters1-2.1@6716.5,2567.69
  Bottom Layer w8: J9_Filters1-2.2@6506.5,2730.76 6512.34,2724.91 6512.34,2712.05 6514,2710.39 v1(6514,2690.27)
NetJ9_Filters3-4_1: J9_Filters3-4.1 Q2_Filters3-4.3 R44_Filters3-4.2 | length 153
  Top Layer w8: R44_Filters3-4.2@6375,1124.41 6474.37,1124.41 Q2_Filters3-4.3@6475,1123.78
  Bottom Layer w8: v1(6424.69,1124.41) J9_Filters3-4.1@6477.44,1124.41
NetJ9_Filters3-4_2: J9_Filters3-4.2 Q2_Filters3-4.2 Q4_Filters3-4.2 R45_Filters3-4.1 | length 407.1
  Top Layer w8: v1@6512.51,1083.93 6550.69,1122.1 6566.69,1122.1 Q4_Filters3-4.2@6569,1124.41 ; v1(6514.31,1083.93) 6514.31,1046.95 Q2_Filters3-4.2@6512.4,1045.04 6524.15,1033.29 6524.15,1018.76 6586.5,956.41 6685.97,956.41 6690.9,961.34 R45_Filters3-4.1@6715,961.34
  Bottom Layer w8: J9_Filters3-4.2@6505,1124.41 6510.84,1118.57 6510.84,1105.7 6512.51,1104.04 6512.51,1085.73 v1(6514.31,1083.93)
NetJ11_Filters1-2_1: J11_Filters1-2.1 Q5_Filters1-2.3 R52_Filters1-2.2 | length 226.5
  Top Layer w8: R52_Filters1-2.2@6245.5,3505.81 6272.69,3505.81 v1(6292.36,3525.48) ; v1(6285.5,3602.35) Q5_Filters1-2.3@6324.87,3602.35
  Bottom Layer w8: v1(6292.36,3525.48) 6290.5,3527.34 6290.5,3552.12 6287.47,3555.15 6287.47,3600.37 v1(6285.5,3602.35) 6288.49,3602.35 J11_Filters1-2.1@6337.94,3602.35
NetJ11_Filters1-2_2: J11_Filters1-2.2 Q5_Filters1-2.2 Q7_Filters1-2.2 R53_Filters1-2.1 | length 272.8
  Top Layer w8: Q5_Filters1-2.2@6246.13,3564.95 6378.09,3564.95 R53_Filters1-2.1@6385.5,3572.35 Q7_Filters1-2.2@6385.5,3513.35
  Bottom Layer w8: J11_Filters1-2.2@6365.5,3602.35 6371.34,3596.51 6371.34,3580.51 6385.5,3566.35 v1(6385.5,3539.29)
NetJ11_Filters3-4_1: J11_Filters3-4.1 Q5_Filters3-4.3 R52_Filters3-4.2 | length 222.8
  Top Layer w8: R52_Filters3-4.2@6244,1899.46 6267.46,1899.46 v1(6289,1921) ; v1(6284,1996) Q5_Filters3-4.3@6323.37,1996
  Bottom Layer w8: v1(6289,1921) 6289,1925.23 6285.98,1928.25 6285.98,1994.02 v1(6284,1996) 6286.99,1996 J11_Filters3-4.1@6336.44,1996
NetJ11_Filters3-4_2: J11_Filters3-4.2 Q5_Filters3-4.2 Q7_Filters3-4.2 R53_Filters3-4.1 | length 272.8
  Top Layer w8: Q5_Filters3-4.2@6244.63,1958.6 6376.6,1958.6 R53_Filters3-4.1@6384,1966 Q7_Filters3-4.2@6384,1907
  Bottom Layer w8: J11_Filters3-4.2@6364,1996 6369.84,1990.16 6369.84,1974.16 6384,1960 v1(6384,1932.94)
NetJ12_Filters1-2_1: J12_Filters1-2.1 Q6_Filters1-2.3 R54_Filters1-2.2 | length 158.2
  Top Layer w8: v1(6735.5,3662.66) Q6_Filters1-2.3@6735.5,3612.98 6787.02,3612.98 R54_Filters1-2.2@6790,3610
  Bottom Layer w8: J12_Filters1-2.1@6735.5,3609.91 v1(6735.5,3662.66)
NetJ12_Filters1-2_2: J12_Filters1-2.2 Q6_Filters1-2.2 Q8_Filters1-2.2 R55_Filters1-2.1 | length 408.4
  Top Layer w8: R55_Filters1-2.1@6572.43,3372.35 6572.43,3396.45 6567.5,3401.38 6567.5,3505.5 6625.83,3563.83 6645.01,3563.83 6656.13,3574.95 6656.23,3574.84 v1(6695.01,3574.84) 6733.19,3536.66 6733.19,3520.65 Q8_Filters1-2.2@6735.5,3518.35
  Bottom Layer w8: v1(6695.01,3574.84) 6715.12,3574.84 6716.79,3576.51 6729.65,3576.51 J12_Filters1-2.2@6735.5,3582.35
NetJ12_Filters3-4_1: J12_Filters3-4.1 Q6_Filters3-4.3 R54_Filters3-4.2 | length 152.1
  Top Layer w8: Q6_Filters3-4.3@6734,2006.63 R54_Filters3-4.2@6734,2106
  Bottom Layer w8: J12_Filters3-4.1@6734,2003.56 v1(6734,2056.32)
NetJ12_Filters3-4_2: J12_Filters3-4.2 Q6_Filters3-4.2 Q8_Filters3-4.2 R55_Filters3-4.1 | length 405.5
  Top Layer w8: R55_Filters3-4.1@6570.93,1766 6570.93,1790.1 6566,1795.03 6566,1894.18 6629.3,1957.48 6643.51,1957.48 6654.63,1968.6 6654.74,1968.49 v1(6693.52,1968.49) 6731.69,1930.31 6731.69,1914.31 Q8_Filters3-4.2@6734,1912
  Bottom Layer w8: v1(6693.52,1968.49) 6713.63,1968.49 6715.29,1970.16 6728.16,1970.16 J12_Filters3-4.2@6734,1976
NetQ3_Filters1-2_3: Q3_Filters1-2.3 R49_Filters1-2.2 R50_Filters1-2.2 | length 280.1
  Top Layer w8: Q3_Filters1-2.3@6611.5,2300.76 6611.5,2262.73 6620.24,2253.98 6620.24,2220.04 6627.27,2213.01 6672.65,2213.01 6679.68,2220.04 ; R50_Filters1-2.2@6721.5,2230.76 6694.98,2230.76 6684.26,2220.04 6679.68,2220.04 ; R49_Filters1-2.2@6721.5,2285.76 6719.53,2285.76 6679.68,2245.91 6679.68,2227.86 6679.68,2220.04
NetQ3_Filters3-4_3: Q3_Filters3-4.3 R49_Filters3-4.2 R50_Filters3-4.2 | length 280.1
  Top Layer w8: Q3_Filters3-4.3@6610,694.41 6610,656.38 6618.75,647.63 6618.75,613.69 6625.78,606.66 6671.15,606.66 6678.18,613.69 ; R50_Filters3-4.2@6720,624.41 6693.48,624.41 6682.76,613.69 6678.18,613.69 ; R49_Filters3-4.2@6720,679.41 6718.03,679.41 6678.18,639.56 6678.18,613.69
NetQ4_Filters1-2_3: Q4_Filters1-2.3 R51_Filters1-2.2 | length 211.8
  Top Layer w8: Q4_Filters1-2.3@6606.5,2650.76 6626.3,2650.76 6668.77,2693.23 6668.77,2746.54 6722.99,2800.76 R51_Filters1-2.2@6724.96,2800.76
NetQ4_Filters3-4_3: Q4_Filters3-4.3 R51_Filters3-4.2 | length 211.8
  Top Layer w8: Q4_Filters3-4.3@6605,1044.41 6624.8,1044.41 6667.27,1086.88 6667.27,1140.19 6721.5,1194.41 R51_Filters3-4.2@6723.46,1194.41
NetQ7_Filters1-2_3: Q7_Filters1-2.3 R60_Filters1-2.2 R61_Filters1-2.2 | length 195.3
  Top Layer w8: R61_Filters1-2.2@6294.96,3336.35 R60_Filters1-2.2@6294.96,3386.35 6306.71,3398.1 6323.24,3398.1 v1(6341.5,3416.35) ; v1(6299.99,3447.85) 6299.99,3471.85 Q7_Filters1-2.3@6305.5,3477.35
  Bottom Layer w8: v1(6299.99,3447.85) 6304.22,3447.85 6309.66,3442.42 6312.23,3442.42 6338.3,3416.35 v1(6341.5,3416.35)
NetQ7_Filters3-4_3: Q7_Filters3-4.3 R60_Filters3-4.2 R61_Filters3-4.2 | length 195.3
  Top Layer w8: R61_Filters3-4.2@6293.46,1730 R60_Filters3-4.2@6293.46,1780 6305.21,1791.75 6321.75,1791.75 v1(6340,1810) ; v1(6298.5,1841.5) 6298.5,1865.5 Q7_Filters3-4.3@6304,1871
  Bottom Layer w8: v1(6298.5,1841.5) 6302.73,1841.5 6308.16,1836.07 6310.74,1836.07 6336.81,1810 v1(6340,1810)
NetQ8_Filters1-2_3: Q8_Filters1-2.3 R62_Filters1-2.2 | length 191.2
  Top Layer w8: R62_Filters1-2.2@6604.32,3312.39 6604.32,3374.15 6655.5,3425.33 Q8_Filters1-2.3@6655.5,3482.35
NetQ8_Filters3-4_3: Q8_Filters3-4.3 R62_Filters3-4.2 | length 191.2
  Top Layer w8: R62_Filters3-4.2@6602.82,1706.04 6602.82,1767.81 6654,1818.99 Q8_Filters3-4.3@6654,1876
NSS: IC5.12 IC6.12 IC9.1 J3.1 | length 2532.5
  Top Layer w8: J3.1@2930,3305 3119.26,3305 v1(3120.31,3306.05)
  Top Layer w10: v1(3255,1325) 3255.59,1325.59 IC9.1@3402.6,1325.59 ; v1(3265.19,1720) IC6.12@3325.43,1720 ; v1(3265.37,2172.74) 3266.5,2173.87 3321.59,2173.87 IC5.12@3322.72,2175
  Bottom Layer w10: v1(3120.31,3306.05) 3250.31,3176.05 3250.31,2409.69 3280,2380 3280,2188.56 3265.22,2173.78 v1@3265,2173.56 ; v1(3255,1325) 3255,1591.63 3264.81,1601.44 3264.81,1719.62 v1(3265.19,1720) ; v1@3265.19,1721.96 3270.84,1721.96 3276.69,1727.82 3276.81,1727.82 3276.81,1787.71 3256.19,1808.33 3256.19,1951.19 3265,1960 3265,2172.37 v1(3265.37,2172.74)
Q1: IC8.14 J15.1 | length 313.6
  Top Layer w10: IC8.14@4047.13,1394.71 4047.3,1394.88 v1(4130,1394.88)
  Bottom Layer w10: v1(4130,1394.88) J15.1@4360.63,1394.88
Q2: IC8.12 J17.1 | length 312.9
  Top Layer w10: IC8.12@4047.13,1294.71 v1(4130,1294.71)
  Bottom Layer w10: v1(4130,1294.71) J17.1@4360,1294.71
Q3: IC8.5 J19.1 | length 750.7
  Top Layer w10: IC8.5@3833.58,1294.71 3874.62,1294.71 3890,1279.33 3890,1119 3960.41,1048.6 4251.4,1048.6 v1(4290.43,1009.57)
  Bottom Layer w10: v1(4290.43,1009.57) 4320,980 J19.1@4360,980
Q4: IC8.4 J21.1 | length 871.1
  Top Layer w10: IC8.4@3833.58,1344.71 3884.86,1344.71 3908,1321.56 3908,1126.46 3967.86,1066.6 4282.93,1066.6 v1(4303.46,1046.08)
  Bottom Layer w10: v1(4303.46,1046.08) 4319.53,1030 J21.1@4460,1030
Q_1_Filters1-2: IC20_Filters1-2.1 R51_Filters1-2.1 | length 82.1
  Top Layer w8: IC20_Filters1-2.1@6576.32,2801.58 6657.21,2801.58 R51_Filters1-2.1@6658.03,2800.76
Q_1_Filters3-4: IC20_Filters3-4.1 R51_Filters3-4.1 | length 82.1
  Top Layer w8: IC20_Filters3-4.1@6574.83,1195.23 6655.71,1195.23 R51_Filters3-4.1@6656.54,1194.41
Q_2_Filters1-2: IC20_Filters1-2.16 R62_Filters1-2.1 | length 618.6
  Top Layer w8: IC20_Filters1-2.16@6382.32,2801.58 6430.12,2801.58 6470.5,2841.96 6470.5,3272.02 6510.87,3312.39 R62_Filters1-2.1@6537.39,3312.39
Q_2_Filters3-4: IC20_Filters3-4.16 R62_Filters3-4.1 | length 618.6
  Top Layer w8: IC20_Filters3-4.16@6380.83,1195.23 6428.63,1195.23 6469,1235.61 6469,1665.67 6509.37,1706.04 R62_Filters3-4.1@6535.89,1706.04
Q_POT_T1_Filters1-2: J10_Filters1-2.2 R63_Filters1-2.2 | length 97.3
  Top Layer w10: J10_Filters1-2.2@7396.5,2455.49 7396.5,2466.82 7421.13,2491.46 7469.68,2491.46 R63_Filters1-2.2@7471.5,2493.28
Q_POT_T1_Filters3-4: J10_Filters3-4.2 R63_Filters3-4.2 | length 106.4
  Top Layer w10: J10_Filters3-4.2@7395,840 7395,860.47 7419.64,885.11 7468.18,885.11 R63_Filters3-4.2@7470,886.93
Q_POT_T2_Filters1-2: J13_Filters1-2.2 R57_Filters1-2.2 | length 79.1
  Top Layer w10: J13_Filters1-2.2@7396.5,3736.39 7406.46,3746.35 R57_Filters1-2.2@7471.5,3746.35
Q_POT_T2_Filters3-4: J13_Filters3-4.2 R57_Filters3-4.2 | length 86.5
  Top Layer w10: J13_Filters3-4.2@7395,2122.68 7395,2130.04 7404.96,2140 R57_Filters3-4.2@7470,2140
Q_POT_W1_Filters1-2: J10_Filters1-2.4 J15.2 R48_Filters1-2.1 | length 4379.1
  Top Layer w8: R48_Filters1-2.1@6376.5,2602.73 6388.24,2614.47 6390.11,2614.47 v1(6402.61,2626.92) v1(6402.61,2626.92)
  Top Layer w10: J10_Filters1-2.4@7346.5,2446.35 v1(7346.5,2513.3)
  Layer 1 w10: v1(4590,2676.81) 5311.32,2674.3 ccw(c5311.41,2701.11) 5311.81,2674.3 5581.07,2678.29 cw(c5581.47,2651.48) 5587.63,2677.57 5819.09,2622.93 ccw(c5825.25,2649.03) 5823.52,2622.27 6020.2,2609.56 ccw(c6021.95,2636.31) 6020.74,2609.53 6219.44,2600.49 ccw(c6220.66,2627.28) 6224.71,2600.77 6395.15,2626.8 cw(c6396.66,2616.92) 6396.66,2626.92 v1(6402.61,2626.92) 6415.54,2603.14 ccw(c6439.09,2615.95) 6423.05,2594.46 6507.71,2531.24 ccw(c6523.75,2552.72) 6520.78,2526.08 6932.23,2480.15 ccw(c6935.21,2506.8) 6933.83,2480.02 7009.15,2476.16 ccw(c7010.53,2502.93) 7013.49,2476.28 v1(7346.5,2513.3)
  Layer 2 w10: v1(4544.88,1394.88) 4544.88,1413.41 4550.73,1419.27 4559.6,1419.27 4574,1433.67 4574,2114.91 4575.27,2116.18 4575.27,2662.1 v1(4590,2676.81)
  Bottom Layer w10: J15.2@4390.18,1392.89 J15.2@4388.19,1394.88 v1(4544.88,1394.88)
Q_POT_W1_Filters3-4: J10_Filters3-4.4 J19.2 R48_Filters3-4.1 | length 3211.3
  Top Layer w8: R48_Filters3-4.1@6375,994.41 6375,996.38 6386.75,1008.13 6388.61,1008.13 v1(6401.11,1020.57) v1(6401.11,1020.57)
  Top Layer w10: v1(7293.78,739.98) 7345,791.21 J10_Filters3-4.4@7345,840
  Layer 1 w8: 6394.7,994.12 6394.7,998.42 cw(c6402.7,998.41) 6395.05,1000.75 v1(6401.11,1020.57)
  Layer 1 w10: v1(4541.04,981.04) 5187.24,1011.97 cw(c5188.52,985.19) 5200.2,1009.32 5322.38,950.2 cw(c5310.7,926.06) 5323.23,949.76 5357.47,931.66 ccw(c5370,955.36) 5366.35,928.8 5522.34,907.37 ccw(c5525.98,933.93) 5525.79,907.12 6159.81,902.6 ccw(c6160,929.41) 6170.12,904.58 6387.97,993.38 cw(c6391.74,984.12) 6391.74,994.12 6394.7,994.12 6397.19,992.5 cw(c6391.74,984.12) 6397.54,992.26 6398.9,991.29 ccw(c6404.65,999.48) 6399.24,991.07 6399.54,990.87 ccw(c6404.95,999.29) 6399.69,990.78 6507.89,923.03 ccw(c6522.12,945.76) 6508.26,922.8 6816.15,737.04 ccw(c6830,760) 6831.86,733.25 7242.18,761.75 cw(c7244.04,735) 7256.09,758.95 v1(7293.78,739.98)
  Bottom Layer w10: J19.2@4387.56,980 4388.6,981.04 v1(4541.04,981.04)
Q_POT_W2_Filters1-2: J13_Filters1-2.4 J17.2 R59_Filters1-2.1 | length 5521.6
  Top Layer w8: R59_Filters1-2.1@6618.27,3708.92 6630.01,3697.17 6646.82,3697.17 6650.87,3693.13 v1(6655.1,3693.13) ; v1(6751.29,3792.1) 6755.52,3792.1 6765.24,3782.38 7168.88,3782.38 7196.5,3810 7307.19,3810 7317,3800.19 7319.57,3800.19 7346.5,3773.26 J13_Filters1-2.4@7346.5,3729.02
  Layer 1 w10: v1(4621.18,3670.77) 4623.79,3673.38 4632.28,3673.38 4633.85,3674.95 5704.85,3674.95 5744.29,3714.38 6284.38,3714.38 6306.91,3736.91 6611.31,3736.91 v1(6655.1,3693.13)
  Layer 2 w10: v1(4544.71,1294.71) 4610,1360 4610,2100 4611.3,2101.3 4611.3,2281.3 4646.81,2316.81 4646.81,2401.11 4620,2427.92 4620,3669.59 v1(4621.18,3670.77)
  Bottom Layer w8: v1(6655.1,3693.13) 6655.1,3695.54 v1@6751.29,3791.73
  Bottom Layer w10: J17.2@4389.72,1292.55 J17.2@4387.56,1294.71 v1(4544.71,1294.71)
Q_POT_W2_Filters3-4: J13_Filters3-4.4 J21.2 R59_Filters3-4.1 | length 4394.7
  Top Layer w8: R59_Filters3-4.1@6604,2106 6605.97,2106 6617.72,2094.25 6617.72,2092.39 v1(6630.16,2079.89) v1(6630.16,2079.89)
  Top Layer w10: J13_Filters3-4.4@7345,2122.68 v1(7345,2179.76)
  Layer 1 w10: v1(4550,1030) 5369.35,1060.6 cw(c5370.35,1033.81) 5379.57,1058.99 5516.77,1008.76 ccw(c5525.98,1033.93) 5525.77,1007.12 6020.24,1003.16 ccw(c6020.46,1029.97) 6026.51,1003.85 6213.12,1047.05 cw(c6219.17,1020.93) 6219.22,1047.74 6401.16,1047.38 cw(c6401.11,1020.57) 6408.83,1046.25 6445.32,1035.27 cw(c6437.6,1009.6) 6449.17,1033.79 6573.09,974.51 ccw(c6584.66,998.7) 6575.59,973.47 v1(6780,900) ; v1(6630.16,2079.89) v1(7345,2179.76)
  Layer 2 w10: v1(6630.16,2079.89) 6666.71,2043.35 6666.71,1597.02 6685.55,1578.18 6685.55,994.45 v1(6780,900)
  Bottom Layer w10: J21.2@4487.56,1030 v1(4550,1030)
Reg_Pin1: IC5.3 J7.1 | length 827.9
  Top Layer w8: J7.1@2927.68,2415 3001.84,2415 3082.53,2334.31 v1(3129.35,2334.31) ; v1(3129.82,2201.53) 3130.63,2200.71 3174.29,2200.71 3275.2,2099.8 3358.2,2099.8 3362.99,2095 3460,2095 3480,2075 IC5.3@3537.28,2075
  Bottom Layer w8: v1(3129.35,2334.31) 3129.35,2202 v1(3129.82,2201.53)
Reg_Pin2: IC5.4 J7.2 | length 1037.5
  Top Layer w8: J7.2@2762.32,2415 2837.69,2415 2880.65,2457.96 3036.97,2457.96 3090,2404.93 v1(3090,2370) ; v1(3090,2230) 3091.37,2231.37 3168.63,2231.37 3253.07,2146.93 3284.37,2146.93 3287.64,2150.2 3366.61,2150.2 3367.21,2150.81 3477.48,2150.81 3499.46,2128.83 3533.45,2128.83 IC5.4@3537.28,2125
  Bottom Layer w8: v1(3090,2230) v1(3090,2370)
Reg_Pin3: IC5.5 J7.3 | length 735.9
  Top Layer w8: J7.3@2927.68,2365 2928.84,2363.83 v1(3016.51,2363.83) ; v1(3016.67,2284.5) 3043.63,2257.54 3180.96,2257.54 3240.22,2198.27 3261.61,2198.27 3263.13,2199.8 3358.2,2199.8 3382.99,2175 IC5.5@3537.28,2175
  Bottom Layer w8: v1(3016.51,2363.83) 3016.59,2363.75 3016.59,2284.58 v1(3016.67,2284.5)
Reg_Pin4: IC5.6 J7.4 | length 970.8
  Top Layer w8: J7.4@2762.32,2365 2806.56,2365 2840.56,2399 2844.31,2399 2887.27,2441.96 3016.47,2441.96 v1(3056.98,2401.45) ; v1(3051.41,2288.46) 3066.33,2273.54 3237.96,2273.54 3261.71,2249.8 3358.2,2249.8 3382.99,2225 IC5.6@3537.28,2225
  Bottom Layer w8: v1(3051.41,2288.46) 3052.98,2290.03 3052.98,2312.27 3056.98,2316.27 v1(3056.98,2401.45)
Reg_Pin5: IC5.7 J7.5 | length 627
  Top Layer w8: J7.5@2927.68,2315 2928.68,2316 3111.15,2316 3127.36,2299.8 3358.2,2299.8 3365.86,2292.13 3388.86,2292.13 3406,2275 IC5.7@3537.28,2275
pads on no net: IC4.9 IC4.10 IC4.11 IC4.12 IC4.13 IC7.9 IC7.10 IC7.11 IC7.12 IC7.13 IC10_Filters1-2.2 IC10_Filters1-2.7 IC10_Filters1-2.8 IC10_Filters1-2.9 IC10_Filters1-2.10 IC10_Filters1-2.15 IC10_Filters3-4.2 IC10_Filters3-4.7 IC10_Filters3-4.8 IC10_Filters3-4.9 IC10_Filters3-4.10 IC10_Filters3-4.15 IC13.9 IC13.10 IC13.11 IC13.12 IC13.13 IC14.9 IC14.10 IC14.11 IC14.12 IC14.13 IC20_Filters1-2.2 IC20_Filters1-2.7 IC20_Filters1-2.8 IC20_Filters1-2.9 IC20_Filters1-2.10 IC20_Filters1-2.15 IC20_Filters3-4.2 IC20_Filters3-4.7 IC20_Filters3-4.8 IC20_Filters3-4.9 IC20_Filters3-4.10 IC20_Filters3-4.15 IC30_Filters1-2.2 IC30_Filters1-2.7 IC30_Filters1-2.8 IC30_Filters1-2.9 IC30_Filters1-2.10 IC30_Filters1-2.15 IC30_Filters3-4.2 IC30_Filters3-4.7 IC30_Filters3-4.8 IC30_Filters3-4.9 IC30_Filters3-4.10 IC30_Filters3-4.15 U1.1 U1.2 U1.3 U1.4 U1.5 U2.1 U2.2 U2.3 U2.4 U2.5 U3.1 U3.2 U3.3 U3.4 U3.5 U4.1 U4.2 U4.3 U4.4 U4.5

## Polygon pours and split planes (outlines as drawn)
GND on Bottom Layer "NONET_L02_P-001" (solid, remove dead copper, pour order 8): 5110,3880 5110,472.44 7520,472.44 7520,3880
GND on Bottom Layer "NONET_L02_P-001" (solid, remove dead copper, pour order 4): 2650,3880 2650,472.44 5110,472.44 5110,3880 4850,3880
GND on Layer 2 "NONET_L02_P-001" (solid, remove dead copper, pour order 3): 5105.19,3880 7520,3880 7520,480 7510,470 5105.19,470
GND on Layer 2 "NONET_L02_P-001" (solid, remove dead copper, pour order 0): 5110,3880 5110,472.44 7520,472.44 7520,3880
+5 on Layer 2 "NONET_L02_P-001" (solid, remove dead copper, pour order 5): 2710,3240 2750,3200 2750,2390 2750,2280 3230,2280 3400,2280 3420,2260 3420,1500 3400,1480 3350,1480 3310,1520 3310,2050 3270,2090 3180,2090 3150,2060 2680,2060 2640,2100 2640,3240
GND on Layer 2 "NONET_L02_P-001" (solid, remove dead copper, pour order 10): 2970,3050 2970,2560 3100,2430 3310,2430 3340,2460 3340,2990 3280,3050
-12 on Layer 1 "NONET_L02_P-001" (solid, remove dead copper, pour order 7): 2640,2890 3470,2890 3490,2910 3690,2910 4130,3350 4290,3350 4290,3360 4480,3550 6250,3550 6290,3590 6930,3590 6980,3540 6980,3490 6960,3470 6740,3470 6430,3470 6380,3420 6379.34,3420.66 6119.34,3420.66 6110,3430 6069.85,3389.85 5880.15,3389.85 5979.62,3290.38 6090.37,3290.38 6140.8,3239.95 6162.19,3239.95 6202.24,3280 7090,3280 7210,3400 7210,3510 7000,3720 5749.91,3720 5699.91,3670 3950,3670 3410,3130 2640,3130
+12 on Layer 1 "NONET_L02_P-001" (solid, remove dead copper, pour order 6): 2640,2890 3470,2890 3500,2920 3510,2910 3690,2910 4130,3350 4290,3350 4290,3360 4480,3550 6250,3550 6290,3590 6930,3590 6980,3540 6980,3490 6960,3470 6740,3470 6430,3470 6380,3420 6100,3420 6069.85,3389.85 4652.84,3389.85 4012.99,2750 2660,2750 2640,2770
DGND on Top Layer "NONET_L02_P-001" (solid, remove dead copper, pour order 1): 2650,3880 2650,472.44 5080,472.44 5080,3880 4850,3880

## Silkscreen, mask and mechanical layers (free items; w line width, h text height)
Mechanical 4:
  lines w5: 2645,472.44 7520,472.44 7520,3880 2850,3880 2645,3880 2645,472.44